# Altium PCB DUTBoard_Sandbox.PcbDoc (part 2 of 6)
Units mil, origin at the board's own origin, x right, y up, seen from the top; angles counter-clockwise.
Board outline 5475 x 5475 mil, 4 copper layers (Top Layer, Mid-Layer 1, Mid-Layer 2, Bottom Layer); 89 components, 507 nets, 1705 pads, 1204 vias.
Unrouted connection lines stored in the file: 6.
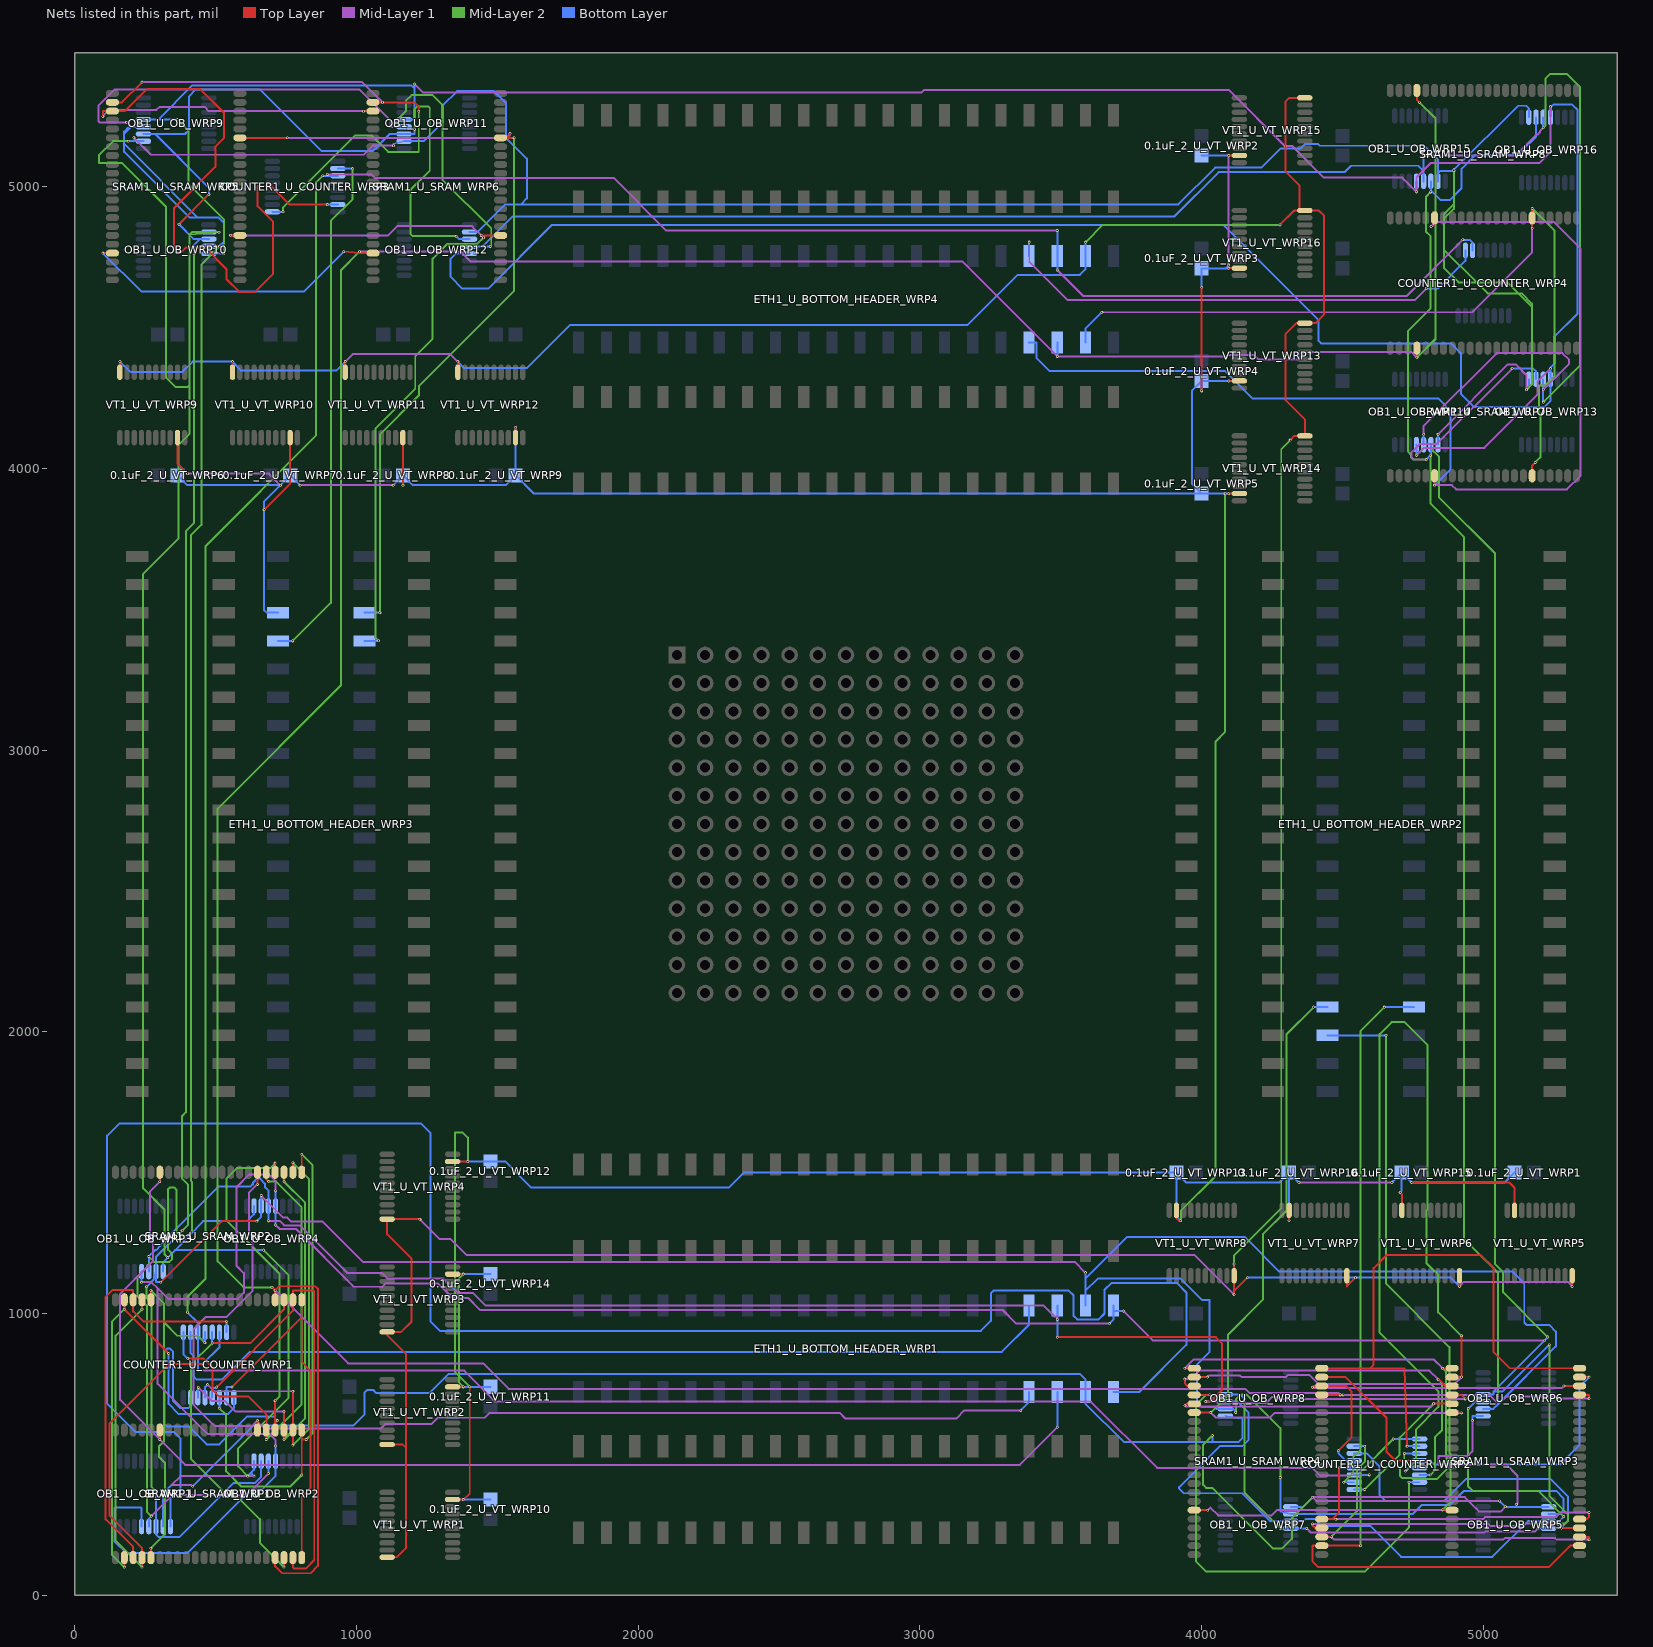
[diagram p4: the nets of this part, all layers, seen from the top]

## Via types
v1: diameter 10, hole 5, Top Layer to Bottom Layer, 1204 vias

## Nets (pads, with @x,y where several pads share a name; then routed paths per layer and width w, separated by ;. In a path a pad name is that pad's centre, name@x,y a point inside that pad or via, vN(x,y) a via of type N, cw(c..) or ccw(c..) an arc to the next point about the centre after c; other vN are vias at no path point) (continued)
ADDRB_B10: COUNTER1_U_COUNTER_WRP3.ADDR10 SRAM1_U_SRAM_WRP5.ADDR10 SRAM1_U_SRAM_WRP6.ADDR10 | length 3174.9
  Top Layer w7: v1(100,5249) 100,5267.72 SRAM1_U_SRAM_WRP5.ADDR10@133.62,5267.72 177.72,5267.72 256,5346 446,5346 529,5263 529,5172 499,5142 499,5070 353,4924 353,4776 362,4767 378,4767 395,4784 461,4784 538.5,4706.5 538.5,4670.76 583.26,4626 640,4626 704,4690 704,4875 649,4930 649,5002 697,5002 762.98,4936.02 v1(896,4936.02) ; v1(1025,5267.72) SRAM1_U_SRAM_WRP6.ADDR10@1058.62,5267.72
  Mid-Layer 1 w7: v1(100,5249) 123,5272 290,5272 301,5283 461,5283 476.28,5267.72 v1(1025,5267.72)
  Bottom Layer w7: v1(896,4936.02) COUNTER1_U_COUNTER_WRP3.ADDR10@933.64,4936.02
ADDRB_B11: COUNTER1_U_COUNTER_WRP3.ADDR11 SRAM1_U_SRAM_WRP5.ADDR11 SRAM1_U_SRAM_WRP6.ADDR11 | length 2012.4
  Top Layer w7: SRAM1_U_SRAM_WRP5.ADDR11@133.62,5299.21 167,5299.21 v1(238.79,5371) ; SRAM1_U_SRAM_WRP6.ADDR11@1058.62,5299.21 v1(1092.24,5299.21) 1205,5299.21 1221,5283.21 v1(1221,5267.21)
  Mid-Layer 1 w7: v1(238.79,5371) 1020.46,5371 v1(1092.24,5299.21)
  Mid-Layer 2 w7: v1(739,4910.43) 739,4925 996,5182 1053.2,5182 1112.2,5123 1221,5123 v1(1221,5267.21)
  Bottom Layer w7: COUNTER1_U_COUNTER_WRP3.ADDR11@701.36,4910.43 v1(739,4910.43)
ADDRC_B0: COUNTER1_U_COUNTER_WRP2.ADDR0 SRAM1_U_SRAM_WRP3.ADDR0 SRAM1_U_SRAM_WRP4.ADDR0 | length 1432.9
  Top Layer w7: v1(3940.48,672.91) 3947.3,679.72 SRAM1_U_SRAM_WRP4.ADDR0@3973.62,679.72 ; v1(4823,679.72) SRAM1_U_SRAM_WRP3.ADDR0@4888.62,679.72
  Mid-Layer 1 w7: v1(3940.48,672.91) 3944.09,669.3 4812.57,669.3 v1(4823,679.72)
  Mid-Layer 2 w7: v1(4579,375.43) 4702.38,498.81 4702.38,559.1 v1(4823,679.72)
  Bottom Layer w7: COUNTER1_U_COUNTER_WRP2.ADDR0@4541.36,375.43 v1(4579,375.43)
ADDRC_B1: COUNTER1_U_COUNTER_WRP2.ADDR1 SRAM1_U_SRAM_WRP3.ADDR1 SRAM1_U_SRAM_WRP4.ADDR1 | length 2691.5
  Top Layer w7: SRAM1_U_SRAM_WRP4.ADDR1@3973.62,711.22 v1(4028.8,711.22) ; SRAM1_U_SRAM_WRP3.ADDR1@4888.62,711.22 4920.74,711.22 v1(4935.24,696.72)
  Mid-Layer 1 w7: v1(4028.8,711.22) 4057.72,682.3 4229.3,682.3 4251,704 4269,704 4276.28,696.72 v1(4935.24,696.72)
  Mid-Layer 2 w7: v1(4028.8,711.22) 4016.22,711.22 3979,674 3979,121 4016,84 4579,84 4736,241 v1(4736,401)
  Bottom Layer w7: v1(4736,401) COUNTER1_U_COUNTER_WRP2.ADDR1@4773.64,401.02
ADDRC_B2: COUNTER1_U_COUNTER_WRP2.ADDR2 SRAM1_U_SRAM_WRP3.ADDR2 SRAM1_U_SRAM_WRP4.ADDR2 | length 1436.1
  Top Layer w7: v1(3940,767) 3940,752 3949.28,742.72 SRAM1_U_SRAM_WRP4.ADDR2@3973.62,742.72 ; v1(4839,766) 4840.72,766 4864,742.72 SRAM1_U_SRAM_WRP3.ADDR2@4888.62,742.72
  Mid-Layer 1 w7: v1(3940,767) 3961.67,767 3991.67,797 4808,797 v1(4839,766)
  Mid-Layer 2 w7: v1(4810.61,426.61) 4829,445 4829,562 4853.5,586.5 4853.5,751.5 v1(4839,766)
  Bottom Layer w7: COUNTER1_U_COUNTER_WRP2.ADDR2@4773.64,426.61 v1(4810.61,426.61)
ADDRC_B3: COUNTER1_U_COUNTER_WRP2.ADDR3 SRAM1_U_SRAM_WRP3.ADDR3 SRAM1_U_SRAM_WRP4.ADDR3 | length 4207.1
  Top Layer w7: SRAM1_U_SRAM_WRP4.ADDR3@3973.62,774.21 v1(4020.24,774.21) ; SRAM1_U_SRAM_WRP3.ADDR3@4888.62,774.21 v1@4922,774.21 ; v1(4922,921) v1@4922,774.21 ; v1(4922.24,774.21) v1@4922,774.21
  Mid-Layer 1 w7: v1(4020.24,774.21) 4025.73,779.7 4136,779.7 4141.92,773.78 4299,773.78 4307.07,781.85 4382.15,781.85 4414.78,749.22 4897.26,749.22 v1(4922.24,774.21)
  Mid-Layer 2 w7: v1(4723.7,440.7) 4760,477 4760,587.72 4840.5,668.22 4840.5,723.22 4632,931.72 4632,1992 4674,2034 4720,2034 4802,1952 4802,1370 4798,1366 4798,1178 4839,1137 4839,1004 v1(4922,921)
  Bottom Layer w7: v1(4723.7,440.7) 4735.2,452.2 COUNTER1_U_COUNTER_WRP2.ADDR3@4773.64,452.2
ADDRC_B4: COUNTER1_U_COUNTER_WRP2.ADDR4 SRAM1_U_SRAM_WRP3.ADDR4 SRAM1_U_SRAM_WRP4.ADDR4 | length 1696.4
  Top Layer w7: v1(3940.29,805.71) SRAM1_U_SRAM_WRP4.ADDR4@3973.62,805.71 ; v1(4855,805.71) SRAM1_U_SRAM_WRP3.ADDR4@4888.62,805.71
  Mid-Layer 1 w7: v1(3940.29,805.71) 3970.65,836.07 4824.64,836.07 v1(4855,805.71)
  Mid-Layer 2 w7: v1(4719,503.39) 4719,467 4704,452 4704,424 4712,416 4746,416 4750,412 4834,412 4869.5,447.5 4869.5,494 4866.5,497 4866.5,794.21 v1(4855,805.71)
  Bottom Layer w7: v1(4719,503.39) COUNTER1_U_COUNTER_WRP2.ADDR4@4773.64,503.39
ADDRC_B5: COUNTER1_U_COUNTER_WRP2.ADDR5 SRAM1_U_SRAM_WRP3.ADDR5 SRAM1_U_SRAM_WRP4.ADDR5 | length 2066.5
  Top Layer w7: SRAM1_U_SRAM_WRP4.ADDR5@4426.38,805.71 4598,805.71 ; v1(4729,528.98) 4720.29,805.71 4598,805.71 ; SRAM1_U_SRAM_WRP3.ADDR5@5341.38,805.71 5093,805.71 5036,862.71 5036,1160 4989,1207 4656,1207 4610,1161 4610,817.71 4598,805.71
  Bottom Layer w7: v1(4729,528.98) COUNTER1_U_COUNTER_WRP2.ADDR5@4773.64,528.98
ADDRC_B6: COUNTER1_U_COUNTER_WRP2.ADDR6 SRAM1_U_SRAM_WRP3.ADDR6 SRAM1_U_SRAM_WRP4.ADDR6 | length 1505.8
  Top Layer w7: SRAM1_U_SRAM_WRP4.ADDR6@4426.38,774.21 4511,774.21 4656,629.21 4656,510 4688,478 v1(4811,478) ; SRAM1_U_SRAM_WRP3.ADDR6@5341.38,774.21 v1(5375,774.21)
  Bottom Layer w7: v1(4811,478) v1@4810.9,477.9 ; v1(5375,774.21) 5341,740.21 5341,532 5273,464 4824.8,464 v1@4810.9,477.9 ; v1@4810.9,477.9 4810.8,477.8 COUNTER1_U_COUNTER_WRP2.ADDR6@4773.64,477.8 v1@4810.9,477.9
ADDRC_B7: COUNTER1_U_COUNTER_WRP2.ADDR7 SRAM1_U_SRAM_WRP3.ADDR7 SRAM1_U_SRAM_WRP4.ADDR7 | length 1405.8
  Top Layer w7: v1(4393,738) 4397.72,742.72 SRAM1_U_SRAM_WRP4.ADDR7@4426.38,742.72 4512.28,742.72 4531,724 4531,559 v1(4485,513) ; v1(5285.72,742.72) SRAM1_U_SRAM_WRP3.ADDR7@5341.38,742.72
  Mid-Layer 1 w7: v1(4393,738) 4394.78,736.22 5279.22,736.22 v1(5285.72,742.72)
  Bottom Layer w7: v1(4485,513) 4485,504 4511.2,477.8 COUNTER1_U_COUNTER_WRP2.ADDR7@4541.36,477.8
ADDRC_B8: COUNTER1_U_COUNTER_WRP2.ADDR8 SRAM1_U_SRAM_WRP3.ADDR8 SRAM1_U_SRAM_WRP4.ADDR8 | length 1256
  Top Layer w7: SRAM1_U_SRAM_WRP4.ADDR8@4426.38,270.28 4464,270.28 ; v1(4476.28,270) 4476,270.28 4464,270.28 ; v1(4488,452.2) 4488,294.28 4464,270.28 ; SRAM1_U_SRAM_WRP3.ADDR8@5341.38,270.28 5367.28,270.28 5375,278 v1(5375,293.5)
  Mid-Layer 1 w7: v1(4476.28,270) 4999,270 5007,278 5259,278 5274.5,293.5 v1(5375,293.5)
  Bottom Layer w7: v1(4488,452.2) COUNTER1_U_COUNTER_WRP2.ADDR8@4541.36,452.2
ADDRC_B9: COUNTER1_U_COUNTER_WRP2.ADDR9 SRAM1_U_SRAM_WRP3.ADDR9 SRAM1_U_SRAM_WRP4.ADDR9 | length 2072.1
  Top Layer w7: v1(4393,253) 4393,248 4402.22,238.78 SRAM1_U_SRAM_WRP4.ADDR9@4426.38,238.78 ; v1(5276.22,238.78) SRAM1_U_SRAM_WRP3.ADDR9@5341.38,238.78
  Mid-Layer 1 w7: v1(4393,253) 5017,253 5025,245 5140,245 5149,254 5261,254 v1(5276.22,238.78)
  Bottom Layer w7: COUNTER1_U_COUNTER_WRP2.ADDR9@4541.36,503.39 4585.61,503.39 4631,458 4631,356 4652,335 4861,335 4939,413 5238,413 5300,351 5300,262.56 v1(5276.22,238.78)
ADDRC_B10: COUNTER1_U_COUNTER_WRP2.ADDR10 SRAM1_U_SRAM_WRP3.ADDR10 SRAM1_U_SRAM_WRP4.ADDR10 | length 1410.6
  Top Layer w7: SRAM1_U_SRAM_WRP4.ADDR10@4426.38,207.28 4460,207.28 v1(4460.28,207) ; SRAM1_U_SRAM_WRP3.ADDR10@5341.38,207.28 5375,207.28 v1(5375,197)
  Mid-Layer 1 w7: v1(4460.28,207) 4470.28,197 5070,197 5076,203 5254,203 5260,197 v1(5375,197)
  Mid-Layer 2 w7: v1(4460.28,207) 4551,297.72 4551,446 4579,474 v1(4579,528.98)
  Bottom Layer w7: COUNTER1_U_COUNTER_WRP2.ADDR10@4541.36,528.98 v1(4579,528.98)
ADDRC_B11: COUNTER1_U_COUNTER_WRP2.ADDR11 SRAM1_U_SRAM_WRP3.ADDR11 SRAM1_U_SRAM_WRP4.ADDR11 | length 1735.3
  Top Layer w7: v1(4564,175.79) SRAM1_U_SRAM_WRP4.ADDR11@4426.38,175.79 4393,175.79 4393,120 4413,100 5232.21,100 5308,175.79 SRAM1_U_SRAM_WRP3.ADDR11@5341.38,175.79
  Mid-Layer 2 w7: v1(4564,175.79) 4564,438.5 v1(4680.07,554.57)
  Bottom Layer w7: v1(4680.07,554.57) COUNTER1_U_COUNTER_WRP2.ADDR11@4773.64,554.57
ADDRD_B0: COUNTER1_U_COUNTER_WRP1.ADDR0 SRAM1_U_SRAM_WRP1.ADDR0 SRAM1_U_SRAM_WRP2.ADDR0 | length 1664.5
  Top Layer w7: v1(401.43,840) 457.5,840 489.5,808 489.5,728 511.5,706 615.72,706 679.72,642 SRAM1_U_SRAM_WRP1.ADDR0@679.72,586.38 v1(679.72,552.76) ; SRAM1_U_SRAM_WRP2.ADDR0@679.72,1501.38 679.72,1476.28 v1(688,1468)
  Mid-Layer 2 w7: v1(679.72,552.76) 805,678.03 805,1377.34 714.34,1468 v1(688,1468)
  Bottom Layer w7: COUNTER1_U_COUNTER_WRP1.ADDR0@385.43,933.64 385.43,856 v1(401.43,840)
ADDRD_B1: COUNTER1_U_COUNTER_WRP1.ADDR1 SRAM1_U_SRAM_WRP1.ADDR1 SRAM1_U_SRAM_WRP2.ADDR1 | length 2270.4
  Top Layer w7: SRAM1_U_SRAM_WRP1.ADDR1@711.22,586.38 711.22,612.22 ; v1(711.22,690.22) 711.22,612.22 ; SRAM1_U_SRAM_WRP2.ADDR1@711.22,1501.38 v1(711.22,1534) ; v1(719,620) 711.22,612.22
  Mid-Layer 2 w7: v1(711.22,690.22) 726,705 726,1142 539,1329 539,1480 575,1516 693.22,1516 v1(711.22,1534)
  Bottom Layer w7: COUNTER1_U_COUNTER_WRP1.ADDR1@411.02,701.36 411.02,672 403.02,664 374,664 349,689 349,864 338,875 328,875 318,865 318,608 327,599 404.75,599 468,535.75 513,535.75 612.25,635 704,635 v1(719,620)
ADDRD_B2: COUNTER1_U_COUNTER_WRP1.ADDR2 SRAM1_U_SRAM_WRP1.ADDR2 SRAM1_U_SRAM_WRP2.ADDR2 | length 1487.5
  Top Layer w7: v1(742.72,552.76) SRAM1_U_SRAM_WRP1.ADDR2@742.72,586.38 v1(742.72,652) ; v1(742.72,1468) SRAM1_U_SRAM_WRP2.ADDR2@742.72,1501.38
  Mid-Layer 1 w7: v1(438.16,737.84) 486,690 533,690 571,652 v1(742.72,652)
  Mid-Layer 2 w7: v1(742.72,552.76) 818,628.04 818,1392.72 v1(742.72,1468)
  Bottom Layer w7: COUNTER1_U_COUNTER_WRP1.ADDR2@436.61,701.36 436.61,736.3 v1(438.16,737.84)
ADDRD_B3: COUNTER1_U_COUNTER_WRP1.ADDR3 SRAM1_U_SRAM_WRP1.ADDR3 SRAM1_U_SRAM_WRP2.ADDR3 | length 1636.1
  Top Layer w7: v1(774.21,533) SRAM1_U_SRAM_WRP1.ADDR3@774.21,586.38 v1(774.21,724) ; SRAM1_U_SRAM_WRP2.ADDR3@774.21,1501.38 v1(774.21,1535)
  Mid-Layer 1 w7: v1(471.5,747.5) 495,724 v1(774.21,724)
  Mid-Layer 2 w7: v1(774.21,533) 831,589.79 831,1478.21 v1(774.21,1535)
  Bottom Layer w7: COUNTER1_U_COUNTER_WRP1.ADDR3@462.2,701.36 462.2,738.2 v1(471.5,747.5)
ADDRD_B4: COUNTER1_U_COUNTER_WRP1.ADDR4 SRAM1_U_SRAM_WRP1.ADDR4 SRAM1_U_SRAM_WRP2.ADDR4 | length 1856
  Top Layer w7: v1(805.71,426.71) 805.71,552.76 ; SRAM1_U_SRAM_WRP1.ADDR4@805.71,586.38 805.71,552.76 ; SRAM1_U_SRAM_WRP2.ADDR4@805.71,1501.38 v1(805.71,1565) ; v1(821.71,552.76) 805.71,552.76
  Mid-Layer 2 w7: v1(513,664) 537,640 537,440 591,386 765,386 v1(805.71,426.71) ; v1(805.71,1565) 844,1526.71 844,575.05 v1(821.71,552.76)
  Bottom Layer w7: v1(513,664) 513.39,664.39 COUNTER1_U_COUNTER_WRP1.ADDR4@513.39,701.36
ADDRD_B5: COUNTER1_U_COUNTER_WRP1.ADDR5 SRAM1_U_SRAM_WRP1.ADDR5 SRAM1_U_SRAM_WRP2.ADDR5 | length 1347.2
  Top Layer w7: v1(558,739) 805.71,986.71 ; SRAM1_U_SRAM_WRP1.ADDR5@805.71,133.62 805.71,349.71 836.21,380.21 836.21,797.5 805.71,828 805.71,986.71 ; SRAM1_U_SRAM_WRP2.ADDR5@805.71,1048.62 805.71,986.71
  Bottom Layer w7: COUNTER1_U_COUNTER_WRP1.ADDR5@538.98,701.36 538.98,739 v1(558,739)
ADDRD_B6: COUNTER1_U_COUNTER_WRP1.ADDR6 SRAM1_U_SRAM_WRP1.ADDR6 SRAM1_U_SRAM_WRP2.ADDR6 | length 1662.3
  Top Layer w7: v1(504,739) 774.21,1009.21 SRAM1_U_SRAM_WRP2.ADDR6@774.21,1048.62 774.21,1082 847,1082 850,1079 850,125 819.72,94.72 778.28,94.72 774.21,98.79 SRAM1_U_SRAM_WRP1.ADDR6@774.21,133.62
  Bottom Layer w7: COUNTER1_U_COUNTER_WRP1.ADDR6@487.8,701.36 487.8,735 500,735 v1(504,739)
ADDRD_B7: COUNTER1_U_COUNTER_WRP1.ADDR7 SRAM1_U_SRAM_WRP1.ADDR7 SRAM1_U_SRAM_WRP2.ADDR7 | length 1391.4
  Top Layer w7: v1(487.8,895.18) 622.9,895.18 742.72,1015 SRAM1_U_SRAM_WRP2.ADDR7@742.72,1048.62 ; v1(742.72,100) SRAM1_U_SRAM_WRP1.ADDR7@742.72,133.62
  Mid-Layer 2 w7: v1(487.8,895.18) 412,819.38 412,485.07 538.21,358.85 568.15,358.85 657,270 657,185.72 v1(742.72,100)
  Bottom Layer w7: v1(487.8,895.18) COUNTER1_U_COUNTER_WRP1.ADDR7@487.8,933.64
ADDRD_B8: COUNTER1_U_COUNTER_WRP1.ADDR8 SRAM1_U_SRAM_WRP1.ADDR8 SRAM1_U_SRAM_WRP2.ADDR8 | length 1249.7
  Top Layer w7: SRAM1_U_SRAM_WRP1.ADDR8@270.28,133.62 v1(270.28,167) ; SRAM1_U_SRAM_WRP2.ADDR8@270.28,1048.62 v1(270.28,1082)
  Mid-Layer 2 w7: v1(270.28,167) 319.5,216.22 319.5,470.5 299,491 299,528 317,546 317,968 ; v1(270.28,1082) 317,1035.28 317,968 ; v1(462,896.2) 437.2,921 364,921 317,968
  Bottom Layer w7: v1(462,896.2) 462.2,896.41 COUNTER1_U_COUNTER_WRP1.ADDR8@462.2,933.64
ADDRD_B9: COUNTER1_U_COUNTER_WRP1.ADDR9 SRAM1_U_SRAM_WRP1.ADDR9 SRAM1_U_SRAM_WRP2.ADDR9 | length 2140.3
  Top Layer w7: v1(238.78,100) SRAM1_U_SRAM_WRP1.ADDR9@238.78,133.62 238.78,167.22 122.49,283.51 122.49,608.49 335,821 v1(455,821) ; v1(238.78,1015) SRAM1_U_SRAM_WRP2.ADDR9@238.78,1048.62
  Mid-Layer 2 w7: v1(238.78,100) 145,193.78 145,921.22 v1(238.78,1015)
  Bottom Layer w7: v1(455,821) 513.39,879.39 COUNTER1_U_COUNTER_WRP1.ADDR9@513.39,933.64
ADDRD_B10: COUNTER1_U_COUNTER_WRP1.ADDR10 SRAM1_U_SRAM_WRP1.ADDR10 SRAM1_U_SRAM_WRP2.ADDR10 | length 1534.1
  Top Layer w7: SRAM1_U_SRAM_WRP1.ADDR10@207.28,133.62 207.28,171.72 109.49,269.51 109.49,1059.49 133,1083 207.28,1083 SRAM1_U_SRAM_WRP2.ADDR10@207.28,1048.62 207.28,1007.72 243.02,971.98 v1(539,971.98)
  Bottom Layer w7: COUNTER1_U_COUNTER_WRP1.ADDR10@538.98,933.64 v1(539,971.98)
ADDRD_B11: COUNTER1_U_COUNTER_WRP1.ADDR11 SRAM1_U_SRAM_WRP1.ADDR11 SRAM1_U_SRAM_WRP2.ADDR11 | length 1711.4
  Top Layer w7: v1(175.79,100) SRAM1_U_SRAM_WRP1.ADDR11@175.79,133.62 ; SRAM1_U_SRAM_WRP2.ADDR11@175.79,1048.62 v1(175.79,1015) v1(333,858)
  Mid-Layer 2 w7: v1(175.79,100) 132,143.79 132,971.21 v1(175.79,1015)
  Bottom Layer w7: v1(333,858) 333,679 368,644 544.57,644 564.57,664 COUNTER1_U_COUNTER_WRP1.ADDR11@564.57,701.36
CLK_1: COUNTER1_U_COUNTER_WRP4.~CLK ETH1_U_BOTTOM_HEADER_WRP4.17 | length 1819.2
  Mid-Layer 1 w7: v1(3388,4803) 3388,4733 3524,4597 4756.28,4597 v1(4797,4637.72)
  Bottom Layer w7: ETH1_U_BOTTOM_HEADER_WRP4.17@3387.5,4753.54 3387.5,4802.5 v1(3388,4803) ; v1(4797,4637.72) 4837.72,4637.72 4936.02,4736.02 COUNTER1_U_COUNTER_WRP4.~CLK@4936.02,4773.64
CLK_2: COUNTER1_U_COUNTER_WRP3.~CLK ETH1_U_BOTTOM_HEADER_WRP3.17 | length 1869.2
  Mid-Layer 2 w7: v1(774,3387.5) 909,3522.5 909,4878 986,4955 v1(986,5063.98)
  Bottom Layer w7: ETH1_U_BOTTOM_HEADER_WRP3.17@721.46,3387.5 v1(774,3387.5) ; COUNTER1_U_COUNTER_WRP3.~CLK@933.64,5063.98 v1(986,5063.98)
CLK_3: COUNTER1_U_COUNTER_WRP2.~CLK ETH1_U_BOTTOM_HEADER_WRP2.17 | length 1889.1
  Mid-Layer 2 w7: v1(4504,401) 4538,435 4538,490.78 4564,516.78 4564,2003.5 v1(4648,2087.5)
  Bottom Layer w7: v1(4504,401) COUNTER1_U_COUNTER_WRP2.~CLK@4541.36,401.02 ; v1(4648,2087.5) ETH1_U_BOTTOM_HEADER_WRP2.17@4753.54,2087.5
CLK_4: COUNTER1_U_COUNTER_WRP1.~CLK ETH1_U_BOTTOM_HEADER_WRP1.17 | length 3279.7
  Bottom Layer w7: COUNTER1_U_COUNTER_WRP1.~CLK@411.02,933.64 411.02,859.41 422.11,848.32 422.11,776 431.61,766.5 523.5,766.5 621,864 3290.5,864 3387.5,961 ETH1_U_BOTTOM_HEADER_WRP1.17@3387.5,1028.54
CLR_COUNTER_W_U_COUNTER_WRP1: COUNTER1_U_COUNTER_WRP1.CLR COUNTER1_U_COUNTER_WRP2.CLR COUNTER1_U_COUNTER_WRP3.CLR COUNTER1_U_COUNTER_WRP4.CLR ETH1_U_BOTTOM_HEADER_WRP4.18 | length 13322.2
  Mid-Layer 1 w7: v1(436.61,797) 1383,797 1493,687 3607,687 3842,452 4393,452 4420.3,424.7 4515.3,424.7 v1(4594.61,427) ; v1(896.39,5043.25) 1052.5,5043.25 1064.75,5031 1913,5031 2100,4844 v1(3487.5,4844) ; v1(3487.5,4704) 3580.5,4611 4727,4611 v1(4927,4811)
  Mid-Layer 2 w7: v1(400,1004.61) 400,1058.61 464,1122.61 464,3724 857,4117 857,5015 v1(880.39,5038.39)
  Bottom Layer w7: v1(400,1004.61) 436.61,968 COUNTER1_U_COUNTER_WRP1.CLR@436.61,933.64 v1(436.61,797) ; v1(880.39,5038.39) 901.25,5038.39 ; v1(896.39,5043.25) 901.25,5038.39 ; COUNTER1_U_COUNTER_WRP3.CLR@933.64,5038.39 901.25,5038.39 ; v1(3487.5,4704) ETH1_U_BOTTOM_HEADER_WRP4.18@3487.5,4753.54 v1(3487.5,4844) ; COUNTER1_U_COUNTER_WRP2.CLR@4541.36,426.61 4594.23,426.61 v1(4594.61,427) ; v1(4927,4811) 4952,4811 4961.61,4801.39 COUNTER1_U_COUNTER_WRP4.CLR@4961.61,4773.64
EN: ETH1_U_BOTTOM_HEADER_WRP4.19 VT1_U_VT_WRP1.EN VT1_U_VT_WRP2.EN VT1_U_VT_WRP3.EN VT1_U_VT_WRP4.EN VT1_U_VT_WRP5.EN VT1_U_VT_WRP6.EN VT1_U_VT_WRP7.EN VT1_U_VT_WRP8.EN VT1_U_VT_WRP9.EN VT1_U_VT_WRP10.EN VT1_U_VT_WRP11.EN VT1_U_VT_WRP12.EN VT1_U_VT_WRP13.EN VT1_U_VT_WRP14.EN VT1_U_VT_WRP15.EN VT1_U_VT_WRP16.EN | length 15339.1
  Top Layer w7: VT1_U_VT_WRP9.EN@159.84,4341.14 159.84,4378.84 v1(160,4379) ; VT1_U_VT_WRP10.EN@559.84,4341.14 v1(559.84,4378.7) ; VT1_U_VT_WRP11.EN@959.84,4341.14 v1(959.84,4378.7) ; VT1_U_VT_WRP1.EN@1108.86,134.84 1143,134.84 1176,167.84 1176,522.84 ; VT1_U_VT_WRP2.EN@1108.86,534.84 1164,534.84 1176,522.84 ; v1(1225,1334.84) VT1_U_VT_WRP4.EN@1108.86,1334.84 1108.86,1281.14 1195.65,1194.35 1195.65,971.65 1158.84,934.84 VT1_U_VT_WRP3.EN@1108.86,934.84 1108.86,923.14 1176,856 1176,522.84 ; VT1_U_VT_WRP12.EN@1359.84,4341.14 v1(1359.84,4378.7) ; v1(4115,1067) 4115.16,1067.16 4115.16,1080.16 ; v1(4115.16,1175.84) VT1_U_VT_WRP8.EN@4115.16,1133.86 4115.16,1080.16 ; v1(4162,1127) 4115.16,1080.16 ; v1(4277.84,4864) 4329,4915.16 VT1_U_VT_WRP16.EN@4348,4915.16 ; v1(4314,4100) 4329.16,4115.16 VT1_U_VT_WRP14.EN@4366.14,4115.16 4367,4115.16 4367,4173 4298,4242 4298,4477.16 4336,4515.16 VT1_U_VT_WRP13.EN@4366.14,4515.16 4404,4515.16 4435,4546.16 4435,4896.16 4416,4915.16 VT1_U_VT_WRP16.EN@4366.14,4915.16 VT1_U_VT_WRP16.EN@4348,4915.16 ; VT1_U_VT_WRP15.EN@4366.14,5315.16 4311,5315.16 4298.08,5302.24 4298.08,5052.92 4348,5003 VT1_U_VT_WRP16.EN@4348,4915.16 ; VT1_U_VT_WRP7.EN@4515.16,1133.86 4515.16,1096.3 v1(4545.84,1127) ; v1(4915.16,1096.3) VT1_U_VT_WRP6.EN@4915.16,1133.86 ; v1(5315,1096) 5315.16,1096.16 VT1_U_VT_WRP5.EN@5315.16,1133.86
  Mid-Layer 1 w7: v1(959.84,4378.7) 986.14,4405 1333.54,4405 v1(1359.84,4378.7) ; v1(1225,1334.84) 1296.2,1263.64 1334.5,1263.64 1391.14,1207 3975,1207 v1(4115,1067) ; v1(4915.16,1096.3) 4930.86,1112 5299,1112 v1(5315,1096)
  Mid-Layer 2 w7: v1(3588,4803) 3649,4864 v1(4277.84,4864) ; v1(4115.16,1175.84) 4115.16,1206.16 4282.46,1373.46 4282.46,4068.46 v1(4314,4100)
  Bottom Layer w7: v1(160,4379) 197,4342 381.65,4342 418.65,4379 559.54,4379 v1(559.84,4378.7) 591.54,4347 928.14,4347 v1(959.84,4378.7) ; v1(1359.84,4378.7) 1382.54,4356 1605,4356 1758,4509 3169,4509 3347,4687 3568,4687 3587.5,4706.5 ETH1_U_BOTTOM_HEADER_WRP4.19@3587.5,4753.54 3587.5,4802.5 v1(3588,4803) ; v1(4162,1127) v1(4545.84,1127) 4884.46,1127 v1(4915.16,1096.3)
FPGA_Q: ETH1_U_BOTTOM_HEADER_WRP1.21 OB1_U_OB_WRP1.Q | length 6968.4
  Bottom Layer w7: OB1_U_OB_WRP1.Q@339.57,243.86 339.57,342 376,378.43 376,556 352,580 215,580 115,680 115,1631 159,1675 1228,1675 1263,1640 1263,971 1296,938 3216,938 3252,974 3252,1072 3261,1081 3528,1081 3545,1064 3545,992 3558,979 3634,979 3655,1000 3655,1084 3680,1109 3911,1109 3945.5,1074.5 3945.5,889 3777.5,721 3687.5,721 ETH1_U_BOTTOM_HEADER_WRP1.21@3687.5,721.46
FPGA_SHCP: ETH1_U_BOTTOM_HEADER_WRP1.19 OB1_U_OB_WRP1.SHCP OB1_U_OB_WRP2.SHCP OB1_U_OB_WRP3.SHCP OB1_U_OB_WRP4.SHCP OB1_U_OB_WRP5.SHCP OB1_U_OB_WRP6.SHCP OB1_U_OB_WRP7.SHCP OB1_U_OB_WRP8.SHCP OB1_U_OB_WRP9.SHCP OB1_U_OB_WRP10.SHCP OB1_U_OB_WRP11.SHCP OB1_U_OB_WRP12.SHCP OB1_U_OB_WRP13.SHCP OB1_U_OB_WRP14.SHCP OB1_U_OB_WRP15.SHCP OB1_U_OB_WRP16.SHCP | length 22553.5
  Top Layer w7: v1(305,1111) 522,1328 v1(646.61,1328) ; v1(370,4866.39) v1(476,4972.39)
  Mid-Layer 1 w7: v1(661.61,1418.7) 739.87,1340.44 754.32,1340.44 768.76,1326 880,1326 1023,1183 3549.5,1183 v1(3587.5,1145) ; v1(4797,4031) 4754,4031 4745,4040 4745,4057 4775,4087 4835,4087 v1(5102,4354)
  Mid-Layer 2 w7: v1(255,1095) 255,1054.9 272,1037.9 272,385 v1(288.39,368.61) ; v1(381,1293.61) 402.07,1314.68 402.07,1457.5 381,1478.57 381,1701 394,1714 394,3776.46 423,3805.46 v1(423,4761) ; v1(1206,5203) 1206,5275 1216,5285 1255.21,5285 1260,5280.21 1260,5056.39 1191.5,4987.89 1191.5,4832 1199.5,4824 v1(1353.39,4824) ; v1(4121,649) 4121,695 4138,712 4160,712 4279,593 v1(4279,418) ; v1(4797,4031) 4751.88,4031 4742.88,4040 4742.88,4049.12 4731.7,4060.3 4731.7,4486.7 4812,4567 4812,4824.77 4796.27,4840.5 4796.27,4963.89 v1(4813.39,4981) ; v1(4812,4046) 4812,3875.3 4931,3756.3 4931,1265.5 5051,1145.5 v1(5051,709)
  Bottom Layer w7: OB1_U_OB_WRP9.SHCP@243.86,5186.61 285.61,5186.61 ; v1(255,1095) 279.39,1119.39 OB1_U_OB_WRP3.SHCP@288.39,1148.86 ; v1(288.39,368.61) OB1_U_OB_WRP1.SHCP@288.39,243.86 288.39,216 298.39,206 371,206 564,399 640,399 661.61,420.61 OB1_U_OB_WRP2.SHCP@661.61,476.14 ; v1(305,1111) 289,1111 OB1_U_OB_WRP3.SHCP@288.39,1148.86 ; v1(370,4866.39) 423,4813.39 444.39,4813.39 ; v1(381,1293.61) 288.39,1201 OB1_U_OB_WRP3.SHCP@288.39,1148.86 ; v1(423,4761) 423,4792 444.39,4813.39 ; v1(476,4972.39) 476,4996.23 285.61,5186.61 ; OB1_U_OB_WRP10.SHCP@476.14,4813.39 444.39,4813.39 ; v1(646.61,1328) 661.61,1343 OB1_U_OB_WRP4.SHCP@661.61,1381.14 v1(661.61,1418.7) ; v1(1206,5203) 1206,5186.61 OB1_U_OB_WRP11.SHCP@1168.86,5186.61 1118,5186.61 1057.39,5126 876,5126 656.93,5345.07 430.07,5345.07 404.7,5319.7 404.7,5200 391.32,5186.61 285.61,5186.61 ; v1(1353.39,4824) 1364,4813.39 OB1_U_OB_WRP12.SHCP@1401.14,4813.39 ; ETH1_U_BOTTOM_HEADER_WRP1.19@3587.5,1028.54 3587.5,1080 ; v1(3587.5,1145) 3587.5,1124 ; v1(4121,649) 4112,661.61 OB1_U_OB_WRP8.SHCP@4083.86,661.61 4053,661.61 4046.61,668 4000,668 3982.67,685.33 3982.67,817.67 4027.5,862.5 4027.5,1047.5 4002.02,1047.5 3925.52,1124 3631.5,1124 3587.5,1080 ; v1(4279,418) 4279,297.39 OB1_U_OB_WRP7.SHCP@4316.14,288.39 4749.39,288.39 4782,321 4882,321 4931.07,370.07 5257.93,370.07 5284,344 5284,301.89 5270.5,288.39 OB1_U_OB_WRP5.SHCP@5231.14,288.39 ; v1(4797,4031) v1(4812,4046) 4813.39,4047.39 OB1_U_OB_WRP14.SHCP@4813.39,4083.86 ; v1(4813.39,4981) 4813.39,4986.61 ; OB1_U_OB_WRP15.SHCP@4813.39,5018.86 4813.39,4986.61 ; OB1_U_OB_WRP6.SHCP@4998.86,661.61 5035.61,661.61 5051,677 ; v1(5051,709) 5051,677 ; v1(5102,4354) 5176.61,4354 5186.61,4344 OB1_U_OB_WRP13.SHCP@5186.61,4316.14 ; OB1_U_OB_WRP16.SHCP@5186.61,5246.14 5186.61,5177.61 5122,5113 4972,5113 4923,5064 4923,4995 4880,4952 4848,4952 4813.39,4986.61 ; 3587.5,1080 3587.5,1124 ; 3587.5,1124 3734.5,1271 4154,1271 4276,1149 5104,1149 5145,1108 5145,968 5153,960 5233,960 5257,936 5257,883 5051,677
FPGA_STCP: ETH1_U_BOTTOM_HEADER_WRP1.18 OB1_U_OB_WRP1.STCP OB1_U_OB_WRP2.STCP OB1_U_OB_WRP3.STCP OB1_U_OB_WRP4.STCP OB1_U_OB_WRP5.STCP OB1_U_OB_WRP6.STCP OB1_U_OB_WRP7.STCP OB1_U_OB_WRP8.STCP OB1_U_OB_WRP9.STCP OB1_U_OB_WRP10.STCP OB1_U_OB_WRP11.STCP OB1_U_OB_WRP12.STCP OB1_U_OB_WRP13.STCP OB1_U_OB_WRP14.STCP OB1_U_OB_WRP15.STCP OB1_U_OB_WRP16.STCP | length 23148.1
  Top Layer w7: v1(3487.5,916) 4050,916 4072,894 4072,728 4031.2,687.2 v1(4014.3,687.2)
  Mid-Layer 1 w7: v1(184,5228.2) 88.27,5228.2 85,5231.47 85,5288 142.07,5345.07 1009.93,5345.07 1120,5235 v1(1120,5212.2) ; v1(272,281) 346,355 610.2,355 v1(687.2,432) ; v1(687.2,1328.5) 727.3,1328.5 742.8,1313 798,1313 966.5,1144.5 1089.5,1144.5 1109,1125 1308,1125 1360,1073 1413,1073 1458,1028 3438.67,1028 3454.95,1011.72 3456,1011.72 3476.62,991.11 3476.62,990.06 3486.41,990.06 3486.41,980.26 v1(3487.5,979.17) ; v1(4787.8,5111) 5114.62,5111 5187.78,5184.16 5192,5184.16 5200.2,5192.36 5200.2,5196.58 v1(5212.2,5208.58) ; v1(4788,4120.8) 4788,4150.4 5046.6,4409 5279.93,4409 5304,4384.93 5304,4370.8 v1(5212.2,4279)
  Mid-Layer 2 w7: 262.8,1183 262.8,1168.8 222,1128 222,1062.04 256,1028.04 256,297 v1(272,281) ; v1(262.8,1202.2) 282,1183 336,1183 344.48,1191.48 344.48,1213.01 331.5,1225.99 331.5,1441.51 337.99,1448 353,1448 361,1440 361,1288 373,1276 400,1276 416,1292 416,1467 412,1471 412,3762 449,3799 449,4723 v1(514,4788) ; v1(1120,5212.2) 1175.2,5267.41 1175.2,5304 1195.89,5324.69 1270.31,5324.69 1305,5290 1305,5025 1478.27,4851.73 1478.27,4791.11 v1(1474.96,4787.8) ; v1(4946,662.28) 4946,386 4961.93,370.07 5193.93,370.07 v1(5285,279) ; v1(5212.2,4235) 5343,4365.8 5343,5353 5296,5400 5237,5400 5221,5384 5221,5217.38 v1(5212.2,5208.58)
  Bottom Layer w7: v1(184,5228.2) 200,5212.2 ; OB1_U_OB_WRP9.STCP@243.86,5212.2 200,5212.2 ; OB1_U_OB_WRP1.STCP@262.8,243.86 262.8,271.8 v1(272,281) ; OB1_U_OB_WRP3.STCP@262.8,1148.86 262.8,1183 v1(262.8,1202.2) 262.8,1202.42 285.6,1225.22 288.89,1225.22 303.67,1240 303.67,1243.29 311.69,1251.31 320,1251.31 330.49,1261.8 330.49,1270.11 511.38,1451 624,1451 632.61,1459.61 632.61,1464.32 648,1479.7 656,1479.7 675,1460.7 675,1449 687.2,1436.8 OB1_U_OB_WRP4.STCP@687.2,1381.14 v1(687.2,1328.5) ; OB1_U_OB_WRP10.STCP@476.14,4787.8 512,4787.8 529,4804.8 ; v1(514,4788) 529,4803 529,4804.8 ; v1(687.2,432) OB1_U_OB_WRP2.STCP@687.2,476.14 ; v1(1120,5212.2) OB1_U_OB_WRP11.STCP@1168.86,5212.2 ; OB1_U_OB_WRP12.STCP@1401.14,4787.8 1448.54,4787.8 ; v1(1474.96,4787.8) 1448.54,4787.8 ; v1(3487.5,916) v1(3487.5,979.17) ETH1_U_BOTTOM_HEADER_WRP1.18@3487.5,1028.54 ; v1(4014.3,687.2) OB1_U_OB_WRP8.STCP@4083.86,687.2 4127.8,687.2 4167,648 4167,552 4145,530 4066,530 3920,384 3920,378 3936,362 4144,362 4243.2,262.8 OB1_U_OB_WRP7.STCP@4316.14,262.8 4360.8,262.8 4368,270 4403,270 4427,246 4598,246 4708,136 5032,136 5158.8,262.8 OB1_U_OB_WRP5.STCP@5231.14,262.8 5268.8,262.8 v1(5285,279) ; OB1_U_OB_WRP14.STCP@4787.8,4083.86 4787.8,4120.59 v1(4788,4120.8) ; OB1_U_OB_WRP15.STCP@4787.8,5018.86 4787.8,5054.2 ; v1(4787.8,5111) 4787.8,5054.2 ; v1(4946,662.28) 4970.93,687.2 OB1_U_OB_WRP6.STCP@4998.86,687.2 ; v1(5212.2,4235) v1(5212.2,4279) OB1_U_OB_WRP13.STCP@5212.2,4316.14 ; v1(5212.2,5208.58) OB1_U_OB_WRP16.STCP@5212.2,5246.14 ; 200,5212.2 192,5212.2 175,5195.2 175,5123 408,4890 437,4890 ; 200,5212.2 175.5,5187.7 175.5,5151.5 437,4890 ; 437,4890 437.36,4889.64 510.41,4889.64 ; 437,4890 510.05,4890 510.41,4889.64 ; 510.41,4889.64 529,4871.05 529,4804.8 ; 1448.54,4787.8 1554.75,4894 3903.5,4894 4060.5,5051 4507,5051 4530,5074 4768,5074 4787.8,5054.2
FPGA_~CS1: ETH1_U_BOTTOM_HEADER_WRP4.24 SRAM1_U_SRAM_WRP7.~CS SRAM1_U_SRAM_WRP8.~CS | length 3914.7
  Top Layer w7: v1(4814.27,4858.5) 4826.77,4864 SRAM1_U_SRAM_WRP8.~CS@4826.77,4888.62 ; v1(4826.77,3940) SRAM1_U_SRAM_WRP7.~CS@4826.77,3973.62
  Mid-Layer 1 w7: v1(4814.27,4858.5) 4829.77,4874 5251,4874 5345.07,4779.93 5345.07,3974.07 5296,3925 4903.26,3925 4888.26,3940 v1(4826.77,3940)
  Bottom Layer w7: ETH1_U_BOTTOM_HEADER_WRP4.24@3387.5,4446.46 3413,4446.46 3413,4392 3460,4345 4083,4345 4179.92,4248.08 4838.92,4248.08 4884,4203 4884,3997.23 v1(4826.77,3940)
FPGA_~CS2: ETH1_U_BOTTOM_HEADER_WRP3.24 SRAM1_U_SRAM_WRP5.~CS SRAM1_U_SRAM_WRP6.~CS | length 2735.9
  Top Layer w7: v1(553,4827) 553.23,4826.77 SRAM1_U_SRAM_WRP5.~CS@586.38,4826.77 ; v1(1442.61,4826.77) 1458.94,4826.77 ; v1(1450.77,4818.61) 1458.94,4826.77 ; SRAM1_U_SRAM_WRP6.~CS@1511.38,4826.77 1458.94,4826.77
  Mid-Layer 1 w7: v1(553,4827) 1112,4827 1144.89,4859.89 1409.49,4859.89 v1(1442.61,4826.77)
  Mid-Layer 2 w7: v1(1078,3388) 1068,3398 1068,4142 1208.5,4282.5 1208.5,4398.5 1270,4460 1270,4744 1323,4797 1429.17,4797 v1(1450.77,4818.61)
  Bottom Layer w7: ETH1_U_BOTTOM_HEADER_WRP3.24@1028.54,3387.5 1077.5,3387.5 v1(1078,3388)
FPGA_~CS3: ETH1_U_BOTTOM_HEADER_WRP2.24 SRAM1_U_SRAM_WRP3.~CS SRAM1_U_SRAM_WRP4.~CS | length 2635.8
  Top Layer w7: SRAM1_U_SRAM_WRP4.~CS@3973.62,648.23 v1(4032,648.23) ; SRAM1_U_SRAM_WRP3.~CS@4888.62,648.23 4920.77,648.23 v1(4922,647)
  Mid-Layer 1 w7: v1(4032,648.23) 4049.11,631.11 4244.11,631.11 4260,647 v1(4922,647)
  Mid-Layer 2 w7: v1(4032,648.23) 4093.5,709.73 4093.5,925.5 4217,1049 4217,1281 4301,1365 4301,1991.5 v1(4397,2087.5)
  Bottom Layer w7: v1(4397,2087.5) ETH1_U_BOTTOM_HEADER_WRP2.24@4446.46,2087.5
FPGA_~CS4: ETH1_U_BOTTOM_HEADER_WRP1.24 SRAM1_U_SRAM_WRP1.~CS SRAM1_U_SRAM_WRP2.~CS | length 4116.3
  Top Layer w7: SRAM1_U_SRAM_WRP1.~CS@648.23,586.38 v1(648.23,620) ; v1(648.23,1458.23) SRAM1_U_SRAM_WRP2.~CS@648.23,1501.38
  Mid-Layer 1 w7: v1(648.23,1458.23) 618,1428 618,1284 631,1271 631,1081 537,987 464,987 422,945 422,675 497,600 628.23,600 v1(648.23,620) 648.23,615.77 672,592 1087,592 1102,607 1265,607 1288,630 1456,630 1473,647 2715,647 2734,628 3130,628 3158,656 v1(3357.5,656)
  Bottom Layer w7: v1(3357.5,656) 3387.5,686 ETH1_U_BOTTOM_HEADER_WRP1.24@3387.5,721.46
FPGA_~MR: ETH1_U_BOTTOM_HEADER_WRP1.22 OB1_U_OB_WRP1.~MR OB1_U_OB_WRP2.~MR OB1_U_OB_WRP3.~MR OB1_U_OB_WRP4.~MR OB1_U_OB_WRP5.~MR OB1_U_OB_WRP6.~MR OB1_U_OB_WRP7.~MR OB1_U_OB_WRP8.~MR OB1_U_OB_WRP9.~MR OB1_U_OB_WRP10.~MR OB1_U_OB_WRP11.~MR OB1_U_OB_WRP12.~MR OB1_U_OB_WRP13.~MR OB1_U_OB_WRP14.~MR OB1_U_OB_WRP15.~MR OB1_U_OB_WRP16.~MR | length 23268.2
  Mid-Layer 1 w7: v1(209.9,5173.72) 270.62,5113 1025,5113 1057.02,5145.02 v1(1131.3,5145.02) ; v1(418.99,386.99) 413.98,392 344.69,392 375.69,423 v1(614.31,423) v1(636.02,423) ; v1(4839,4121) 5087,4369 5114,4369 5153,4330 v1(5153,4279) ; v1(4961,620) 4961,510.5 4944,493.5 4840.5,493.5 4840.5,464.5 5080.5,464.5 5121,424 5121,327 v1(5117,323) ; v1(5057,335) 4947,335 ; v1(5078,314) 5061,297 4985,297 4947,335 ; 4947,335 4934,348 v1(4394.02,348) 4407,335 4947,335
  Mid-Layer 2 w7: v1(190,5161.02) 136.02,5161.02 85.5,5110.5 85.5,5083.5 168,5083.5 324,4927.5 324,4322 358,4288 400,4288 408,4296 ; v1(329.98,1198.51) 318.5,1209.99 318.5,1368.41 243,1443.91 243,3625 368,3750 368,4082 408,4122 408,4296 ; v1(614.31,423) 579.93,457.37 579.93,521.71 758,699.78 758,1137 v1(670,1225) ; v1(4038,567) 4005,534 4005,392 4016,381 4037,381 4252,166 4286,166 4320,200 4320,274 v1(4394.02,348) ; v1(4895,5059) 4895,4937 ; v1(4895.07,5056) 4895.07,4937.07 4895,4937 ; v1(5153,4279) 5172.23,4298.23 5172.23,4572.77 ; 408,4296 408,4830 ; 408,4830 v1(512.05,4838) 416,4838 408,4830 ; 4859.5,4776.5 4976,4660 ; 4859.5,4776.5 4859.26,4776.74 4859.26,4901.26 4895,4937 ; 4859.5,4776.5 4859.5,4885.5 4895,4921 4895,4937 ; 4859.5,4776.5 4859.5,4712.5 4912,4660 4976,4660 ; 4976,4660 5015,4621 5124,4621 ; 4976,4660 5085,4660 5124,4621 ; 5124,4621 5136,4621 5172.23,4584.77 5172.23,4572.77 ; 5124,4621 5172.23,4572.77
  Bottom Layer w7: v1(190,5161.02) 216,5161.02 ; v1(209.9,5173.72) 216,5161.02 ; OB1_U_OB_WRP9.~MR@243.86,5161.02 216,5161.02 ; OB1_U_OB_WRP1.~MR@313.98,243.86 313.98,362 343.98,392 344.69,392 ; OB1_U_OB_WRP3.~MR@313.98,1148.86 313.98,1182.51 v1(329.98,1198.51) 356.46,1225 ; v1(418.99,386.99) 634,602 989,602 1029,642 1029,720 1037.48,728.48 1059,728.48 1070.48,717 1259,717 1328,786 3568,786 3587.5,766.5 ETH1_U_BOTTOM_HEADER_WRP1.22@3587.5,721.46 3587.5,680 3723.5,544 4038,544 ; OB1_U_OB_WRP10.~MR@476.14,4838.98 511.07,4838.98 v1(512.05,4838) ; v1(614.31,423) 625.16,433.86 ; v1(636.02,423) 625.16,433.86 ; OB1_U_OB_WRP2.~MR@636.02,476.14 636.02,444.72 625.16,433.86 ; OB1_U_OB_WRP4.~MR@636.02,1381.14 636.02,1352 611.61,1327.58 455.56,1327.58 356.46,1225 ; v1(670,1225) 356.46,1225 ; v1(1131.3,5145.02) 1131.3,5152 OB1_U_OB_WRP11.~MR@1168.86,5161.02 1239,5161.02 1306,5228.02 1306,5288 1357,5339 1488,5339 1530,5297 1530,5174 1605,5099 1605,4958 1584,4937 ; OB1_U_OB_WRP12.~MR@1401.14,4838.98 1429.98,4838.98 1528,4937 1584,4937 ; v1(4038,567) 4038,544 ; OB1_U_OB_WRP8.~MR@4083.86,636.02 4111.83,631.11 4144,627.02 4144,557.02 4130.98,544 4038,544 ; OB1_U_OB_WRP7.~MR@4316.14,313.98 4360,313.98 v1(4394.02,348) ; OB1_U_OB_WRP14.~MR@4838.98,4083.86 v1(4839,4121) ; OB1_U_OB_WRP15.~MR@4838.98,5018.86 4838.98,5048 ; v1(4895,5059) 5123,5287 5152,5287 5161.02,5277.98 OB1_U_OB_WRP16.~MR@5161.02,5246.14 ; v1(4895.07,5056) 4846.98,5056 4838.98,5048 ; v1(4961,620) 4961,636.02 OB1_U_OB_WRP6.~MR@4998.86,636.02 ; v1(5057,335) v1(5078,314) 5117,313.98 ; v1(5117,323) 5117,313.98 ; v1(5153,4279) 5161.02,4287.02 OB1_U_OB_WRP13.~MR@5161.02,4316.14 ; OB1_U_OB_WRP5.~MR@5231.14,313.98 5117,313.98 ; 1584,4937 3917.5,4937 4047.5,5067 4212,5067 4281,5136 4351,5136 4366,5151 4413,5151 4419,5145 4789.98,5145 4838.98,5096 4838.98,5048
  other v1: 4394,348
FPGA_~OE: ETH1_U_BOTTOM_HEADER_WRP4.23 SRAM1_U_SRAM_WRP1.~OE SRAM1_U_SRAM_WRP2.~OE SRAM1_U_SRAM_WRP3.~OE SRAM1_U_SRAM_WRP4.~OE SRAM1_U_SRAM_WRP5.~OE SRAM1_U_SRAM_WRP6.~OE SRAM1_U_SRAM_WRP7.~OE SRAM1_U_SRAM_WRP8.~OE | length 16508
  Top Layer w7: v1(100,4764) 100.22,4763.78 SRAM1_U_SRAM_WRP5.~OE@133.62,4763.78 ; v1(700,1093) v1(711,1082) v1@711.22,1081.78 ; SRAM1_U_SRAM_WRP1.~OE@711.22,133.62 711.22,102.78 736,78 837,78 863,104 863,1088 854.23,1096.77 726.21,1096.77 v1@711.22,1081.78 ; SRAM1_U_SRAM_WRP2.~OE@711.22,1048.62 v1@711.22,1081.78 ; v1(955,4769) 1010.09,4764.26 1015.72,4763.78 ; v1(1010.5,4769) 1015.72,4763.78 ; SRAM1_U_SRAM_WRP6.~OE@1058.62,4763.78 1015.72,4763.78 ; SRAM1_U_SRAM_WRP4.~OE@4426.38,711.22 v1(4492,711.22) v1(4502,711.22) ; SRAM1_U_SRAM_WRP7.~OE@4763.78,4426.38 4763.78,4393.22 v1(4764,4393) ; SRAM1_U_SRAM_WRP8.~OE@4763.78,5341.38 4763.78,5308 v1(4773,5298.78) ; SRAM1_U_SRAM_WRP3.~OE@5341.38,711.22 5375,711.22 v1(5375,698)
  Mid-Layer 1 w7: v1(711,1082) 970,823 1449.41,823 1540.2,732.2 4154.8,732.2 4170,717 4486.22,717 v1(4492,711.22) ; v1(1010.5,4769) 1370.71,4769 1406.21,4733.5 3151.5,4733.5 v1(3487.5,4397.09) 4091.09,4397.09 4096,4402 4186,4402 4201,4387 4340,4387 4366,4413 4744,4413 v1(4764,4393) ; v1(4502,711.22) 5021.28,711.22 5044.5,688 5064,688 5081,705 5254,705 5261,698 v1(5375,698)
  Mid-Layer 2 w7: v1(700,1093) 599,1093 507,1185 507,2792 945,3230 945,4703.5 v1(1010.5,4769) ; v1(4764,4393) 4830,4459 4830,5241.78 v1(4773,5298.78)
  Bottom Layer w7: v1(100,4764) 237,4627 813,4627 v1(955,4769) ; v1(3487.5,4397.09) ETH1_U_BOTTOM_HEADER_WRP4.23@3487.5,4446.46
FPGA_~PL: ETH1_U_BOTTOM_HEADER_WRP1.20 OB1_U_OB_WRP1.~PL OB1_U_OB_WRP2.~PL OB1_U_OB_WRP3.~PL OB1_U_OB_WRP4.~PL OB1_U_OB_WRP5.~PL OB1_U_OB_WRP6.~PL OB1_U_OB_WRP7.~PL OB1_U_OB_WRP8.~PL OB1_U_OB_WRP9.~PL OB1_U_OB_WRP10.~PL OB1_U_OB_WRP11.~PL OB1_U_OB_WRP12.~PL OB1_U_OB_WRP13.~PL OB1_U_OB_WRP14.~PL OB1_U_OB_WRP15.~PL OB1_U_OB_WRP16.~PL | length 27228.2
  Mid-Layer 1 w7: v1(237.2,1111) 272,1111 294,1089 ; v1(712.8,529.7) 712.8,550.2 690,573 471,573 294,750 294,1089 ; v1(712.8,1314) 726.8,1300 786,1300 991,1095 1091,1095 1102,1106 1290,1106 1341,1055 1396,1055 1438,1013 3293,1013 3342,964 v1(3672.5,964) ; v1(713,1435) 713,1469 688,1494 620,1494 574,1448 574,1169 600,1143 600,1073 579,1052 331,1052 294,1089 ; v1(1206,5364) 1236.58,5333.42 3005.42,5333.42 3015.5,5343.5 4095.58,5343.5 4295.02,5144.05 4320.95,5144.05 4433,5032 4711.5,5032 v1(4762.2,4981.3) 4762.2,5032.2 4814,5084 5200,5084 5238,5122 v1(5238,5284) ; v1(3722,1009) 3826,905 v1(5218,905) ; v1(4372.8,237.2) 4388,222 5003,222 5008,227 5183.8,227 v1(5194,237.2) ; v1(4762.2,4046) 4788.8,4072.6 5003.1,4072.6 5191.52,4261.02 5191.52,4307.52 v1(5238,4354)
  Mid-Layer 2 w7: v1(363.84,5237.8) 404,5197.64 404,5009 529,4884 v1(529,4762.2) ; v1(4152,696.8) 4152,364 v1(4279,237) ; v1(4762.2,4046) 4788.2,4072 4812,4072 4843,4041 4843,3896 5041.4,3697.6 5041.4,1175.6 5070,1147 5070,1075 v1(5228.54,916.46) ; v1(5194,237.2) 5210.8,254 5289.5,254 5299.5,264 5299.5,288 5234,353.5 v1(5234,889)
  Bottom Layer w7: OB1_U_OB_WRP1.~PL@237.2,243.86 237.2,308.8 234,312 144.86,312 141,308.14 141,191.9 182.21,150.69 400.69,150.69 626,376 664.8,376 712.8,424 OB1_U_OB_WRP2.~PL@712.8,476.14 v1(712.8,529.7) ; v1(237.2,1111) OB1_U_OB_WRP3.~PL@237.2,1148.86 ; OB1_U_OB_WRP9.~PL@243.86,5237.8 296,5237.8 ; v1(363.84,5237.8) 296,5237.8 ; OB1_U_OB_WRP10.~PL@476.14,4762.2 v1(529,4762.2) ; v1(712.8,1314) OB1_U_OB_WRP4.~PL@712.8,1381.14 712.8,1434.8 v1(713,1435) ; OB1_U_OB_WRP11.~PL@1168.86,5237.8 1206,5237.8 1206,5348 ; v1(1206,5364) 1206,5348 ; OB1_U_OB_WRP12.~PL@1401.14,4762.2 1352.2,4762.2 1334,4744 1334,4680 1376,4638 1468,4638 1694,4864 4077,4864 4415,4526 4415,4452 4424,4443 4886,4443 4920,4409 4920,4264 4967,4217 5216,4217 5237.8,4238.8 OB1_U_OB_WRP13.~PL@5237.8,4316.14 v1@5237.8,4353.8 ; v1(3672.5,964) 3687.5,979 ETH1_U_BOTTOM_HEADER_WRP1.20@3687.5,1009 ; ETH1_U_BOTTOM_HEADER_WRP1.20@3687.5,1028.54 ETH1_U_BOTTOM_HEADER_WRP1.20@3687.5,1009 ; v1(3722,1009) ETH1_U_BOTTOM_HEADER_WRP1.20@3687.5,1009 ; OB1_U_OB_WRP8.~PL@4083.86,712.8 4136,712.8 v1(4152,696.8) ; v1(4279,237) 4279.2,237.2 OB1_U_OB_WRP7.~PL@4316.14,237.2 v1(4372.8,237.2) ; v1(4762.2,4046) OB1_U_OB_WRP14.~PL@4762.2,4083.86 ; v1(4762.2,4981.3) OB1_U_OB_WRP15.~PL@4762.2,5018.86 ; OB1_U_OB_WRP6.~PL@4998.86,712.8 5036.04,712.8 ; v1(5194,237.2) OB1_U_OB_WRP5.~PL@5231.14,237.2 ; v1(5218,905) 5036.5,723.5 ; v1(5228.54,916.46) 5036.04,723.96 5036.04,723.5 ; v1(5234,889) 5068.5,723.5 5036.5,723.5 ; v1(5238,4354) v1@5237.8,4353.8 ; v1(5238,5284) v1@5239.5,5282.5 ; 296,5237.8 417.2,5359 1195,5359 1206,5348 ; 5036.04,712.8 5036.04,723.5 ; 5036.04,712.8 5036.5,712.8 5036.5,723.5 ; 5036.04,723.5 5036.5,723.5 ; v1@5237.8,4353.8 5237.8,4356.8 5252,4371 5252,4467 5334,4549 5334,5272 5315,5291 5248,5291 v1@5239.5,5282.5 ; v1@5239.5,5282.5 5237.8,5280.8 OB1_U_OB_WRP16.~PL@5237.8,5246.14 v1@5239.5,5282.5
FPGA_~WE1: ETH1_U_BOTTOM_HEADER_WRP4.22 SRAM1_U_SRAM_WRP7.~WE SRAM1_U_SRAM_WRP8.~WE | length 2934.7
  Top Layer w7: SRAM1_U_SRAM_WRP7.~WE@5173.23,3973.62 5173.23,4010 v1(5184,4020.77) ; v1(5173.23,4852.02) SRAM1_U_SRAM_WRP8.~WE@5173.23,4888.62 v1(5173.23,4922.24)
  Mid-Layer 1 w7: v1(3646,4554) 4961.05,4554 5173.23,4766.18 v1(5173.23,4852.02)
  Mid-Layer 2 w7: v1(5173.23,4922.24) 5253,4842.47 5253,4328 5219,4294 5197,4294 5197,4200 5202,4195 5202,4038.77 v1(5184,4020.77)
  Bottom Layer w7: ETH1_U_BOTTOM_HEADER_WRP4.22@3587.5,4446.46 3587.5,4495.5 v1(3646,4554)
FPGA_~WE2: ETH1_U_BOTTOM_HEADER_WRP3.23 SRAM1_U_SRAM_WRP5.~WE SRAM1_U_SRAM_WRP6.~WE | length 2968.9
  Top Layer w7: SRAM1_U_SRAM_WRP5.~WE@586.38,5173.23 v1(754,5173.23) ; SRAM1_U_SRAM_WRP6.~WE@1511.38,5173.23 1536,5173.23 ; v1(1545,5188) 1545,5182.23 1536,5173.23 ; v1(1559.5,5173.23) 1536,5173.23
  Mid-Layer 1 w7: v1(754,5173.23) 1530.23,5173.23 v1(1545,5188)
  Mid-Layer 2 w7: v1(1083,3487.5) 1083,4119.96 1221.5,4258.46 1221.5,4292 1559.5,4630 v1(1559.5,5173.23)
  Bottom Layer w7: ETH1_U_BOTTOM_HEADER_WRP3.23@1028.54,3487.5 v1(1083,3487.5)
FPGA_~WE3: ETH1_U_BOTTOM_HEADER_WRP2.23 SRAM1_U_SRAM_WRP3.~WE SRAM1_U_SRAM_WRP4.~WE | length 2937.1
  Top Layer w7: SRAM1_U_SRAM_WRP4.~WE@3973.62,301.77 v1(4021.74,301.77) ; v1(4855,303) 4856.23,301.77 SRAM1_U_SRAM_WRP3.~WE@4888.62,301.77
  Mid-Layer 1 w7: v1(4021.74,301.77) 4030.97,311 4058.47,283.5 4248.5,283.5 4268,303 v1(4855,303)
  Mid-Layer 2 w7: v1(4654.34,1987.5) 4654.34,1105.66 4879.5,880.5 4879.5,506.5 4882.5,503.5 4882.5,330.5 v1(4855,303)
  Bottom Layer w7: ETH1_U_BOTTOM_HEADER_WRP2.23@4446.46,1987.5 v1(4654.34,1987.5)
FPGA_~WE4: ETH1_U_BOTTOM_HEADER_WRP1.23 SRAM1_U_SRAM_WRP1.~WE SRAM1_U_SRAM_WRP2.~WE | length 4510.6
  Top Layer w7: v1(301.77,553) SRAM1_U_SRAM_WRP1.~WE@301.77,586.38 ; v1(301.77,1467.77) SRAM1_U_SRAM_WRP2.~WE@301.77,1501.38
  Mid-Layer 1 w7: v1(301.77,1467.77) 267.57,1433.57 267.57,1261.43 278,1251 278,1187 161,1070 161,693.77 v1(301.77,553) 391.77,463 3354.5,463 v1(3487.5,596)
  Bottom Layer w7: v1(3487.5,596) ETH1_U_BOTTOM_HEADER_WRP1.23@3487.5,721.46
GLOBAL_HIGH_POWER: 0.1uF_2_U_VT_WRP1.1 0.1uF_2_U_VT_WRP2.1 0.1uF_2_U_VT_WRP3.1 0.1uF_2_U_VT_WRP4.1 0.1uF_2_U_VT_WRP5.1 0.1uF_2_U_VT_WRP6.1 0.1uF_2_U_VT_WRP7.1 0.1uF_2_U_VT_WRP8.1 0.1uF_2_U_VT_WRP9.1 0.1uF_2_U_VT_WRP10.1 0.1uF_2_U_VT_WRP11.1 0.1uF_2_U_VT_WRP12.1 0.1uF_2_U_VT_WRP13.1 0.1uF_2_U_VT_WRP14.1 0.1uF_2_U_VT_WRP15.1 0.1uF_2_U_VT_WRP16.1 ETH1_U_BOTTOM_HEADER_WRP3.18 VT1_U_VT_WRP1.VCC VT1_U_VT_WRP2.VCC VT1_U_VT_WRP3.VCC VT1_U_VT_WRP4.VCC VT1_U_VT_WRP5.VCC VT1_U_VT_WRP6.VCC VT1_U_VT_WRP7.VCC VT1_U_VT_WRP8.VCC VT1_U_VT_WRP9.VCC VT1_U_VT_WRP10.VCC VT1_U_VT_WRP11.VCC VT1_U_VT_WRP12.VCC VT1_U_VT_WRP13.VCC VT1_U_VT_WRP14.VCC VT1_U_VT_WRP15.VCC VT1_U_VT_WRP16.VCC | length 17381.3
  Top Layer w7: VT1_U_VT_WRP9.VCC@364.57,4108.86 364.57,4016.43 v1(400,3981) ; v1(672,3853) 764.57,3945.57 VT1_U_VT_WRP10.VCC@764.57,4108.86 ; VT1_U_VT_WRP11.VCC@1164.57,4108.86 1164.57,3940.43 v1(1165,3940) ; VT1_U_VT_WRP1.VCC@1341.14,339.57 v1(1378.7,339.57) 1402,360 v1(1402,740) ; VT1_U_VT_WRP2.VCC@1341.14,739.57 v1(1378.7,739.57) ; VT1_U_VT_WRP3.VCC@1341.14,1139.57 v1@1378.57,1139.57 ; VT1_U_VT_WRP4.VCC@1341.14,1539.57 v1(1395,1539.57) ; v1(1379,1140) v1@1378.57,1139.57 ; v1(1379.43,1140) 1379,1139.57 v1@1378.57,1139.57 ; VT1_U_VT_WRP12.VCC@1564.57,4108.86 1564.57,4145.57 v1(1565,4146) ; VT1_U_VT_WRP8.VCC@3910.43,1366.14 3910.43,1338.57 3920,1329 v1(3926,1329) ; v1(4000,4275) v1(4000,4643) ; v1(4096,3910) 4096.43,3910.43 VT1_U_VT_WRP14.VCC@4133.86,3910.43 ; v1(4096,4310) 4096.43,4310.43 VT1_U_VT_WRP13.VCC@4133.86,4310.43 ; v1(4096,4710) 4096.43,4710.43 VT1_U_VT_WRP16.VCC@4133.86,4710.43 ; v1(4096,5110.43) VT1_U_VT_WRP15.VCC@4133.86,5110.43 ; v1(4310,1330.3) 4310.43,1330.74 VT1_U_VT_WRP7.VCC@4310.43,1366.14 ; v1(4704.5,1430) 4710.43,1424.07 VT1_U_VT_WRP6.VCC@4710.43,1366.14 ; v1(4745,1465) 5092.39,1465 5110.43,1446.95 VT1_U_VT_WRP5.VCC@5110.43,1366.14
  Mid-Layer 1 w7: v1(400,3981) 689,3981 v1(730,3940) ; v1(800,3940) v1(1130,3940) ; v1(4096,4721) v1(4096,5110) ; v1(4345,1465) v1(4675,1465)
  Mid-Layer 2 w7: v1(1379,740) 1364,755 1364,778 ; v1(1379,1140) 1364,1125 1364,778 ; v1(1395,1539) v1(1395,1539.57) 1395,1624 1377,1642 1349,1642 1349,793 1364,778 ; v1(1402,740) 1364,778 ; v1(3926,1329) 3926,1364 4049,1487 4049,3030 4083.3,3064.3 v1(4083.3,3910)
  Bottom Layer w7: 0.1uF_2_U_VT_WRP6.1@365,3975 400,3940 v1(730,3940) ; v1(672,3853) 672.5,3830.16 ; ETH1_U_BOTTOM_HEADER_WRP3.18@721.46,3487.5 681,3487.5 672.5,3496 672.5,3830.16 ; v1(800,3940) 0.1uF_2_U_VT_WRP7.1@765,3975 v1(730,3940) ; v1(1130,3940) 0.1uF_2_U_VT_WRP8.1@1165,3975 ; v1(1165,3940) 0.1uF_2_U_VT_WRP8.1@1165,3975 ; v1(1378.7,339.57) 1379.27,339 1475,339 0.1uF_2_U_VT_WRP10.1@1475,340 ; v1(1378.7,739.57) 1379.27,739 1475,739 0.1uF_2_U_VT_WRP11.1@1475,740 v1(1402,740) v1(1379,740) ; v1(1379.43,1140) 0.1uF_2_U_VT_WRP14.1@1475,1140 ; v1(1395,1539) 0.1uF_2_U_VT_WRP12.1@1476,1539 ; v1(1395,1539.57) 1395.43,1540 0.1uF_2_U_VT_WRP12.1@1475,1540 0.1uF_2_U_VT_WRP12.1@1476,1539 ; v1(1565,4146) 0.1uF_2_U_VT_WRP9.1@1565,3975 ; v1(3926,1329) 3910,1345 0.1uF_2_U_VT_WRP13.1@3910,1500 ; v1(4000,4275) 0.1uF_2_U_VT_WRP4.1@4000,4310 ; v1(4000,4643) 0.1uF_2_U_VT_WRP3.1@4000,4710 4085,4710 ; 0.1uF_2_U_VT_WRP2.1@4000,5110 v1@4095.57,5110 ; v1(4096,3910) v1(4083.3,3910) 0.1uF_2_U_VT_WRP5.1@4000,3910 ; v1(4096,4310) 0.1uF_2_U_VT_WRP4.1@4000,4310 ; v1(4096,4710) 4085,4710 ; v1(4096,4721) 4085,4710 ; v1(4096,5110) v1@4095.57,5110 ; v1(4096,5110.43) v1@4095.57,5110 ; v1(4310,1330.3) 0.1uF_2_U_VT_WRP16.1@4310,1500 ; v1(4345,1465) 0.1uF_2_U_VT_WRP16.1@4310,1500 ; v1(4675,1465) 0.1uF_2_U_VT_WRP15.1@4710,1500 ; v1(4704.5,1430) 4710,1435.5 0.1uF_2_U_VT_WRP15.1@4710,1500 ; 0.1uF_2_U_VT_WRP1.1@5110,1500 5075,1465 v1(4745,1465) 0.1uF_2_U_VT_WRP15.1@4710,1500 ; 672.5,3830.16 672.5,3882.5 v1(730,3940) ; 0.1uF_2_U_VT_WRP8.1@1165,3975 1200,3940 1530,3940 0.1uF_2_U_VT_WRP9.1@1565,3975 ; 0.1uF_2_U_VT_WRP12.1@1476,1539 1529,1539 1621,1447 2322,1447 2375,1500 0.1uF_2_U_VT_WRP13.1@3910,1500 ; 0.1uF_2_U_VT_WRP9.1@1565,3975 1630,3910 0.1uF_2_U_VT_WRP5.1@4000,3910 ; 0.1uF_2_U_VT_WRP13.1@3910,1500 3945,1465 4275,1465 0.1uF_2_U_VT_WRP16.1@4310,1500 ; 0.1uF_2_U_VT_WRP5.1@4000,3910 3965,3945 3965,4275 0.1uF_2_U_VT_WRP4.1@4000,4310